# Altium PCB task1_pcb.PcbDoc
Units mm, origin at the board's own origin, x right, y up, seen from the top; angles counter-clockwise.
Board outline 36 x 24.9 mm, 2 copper layers (Top Layer, Bottom Layer); 9 components, 5 nets, 30 pads, 0 vias.
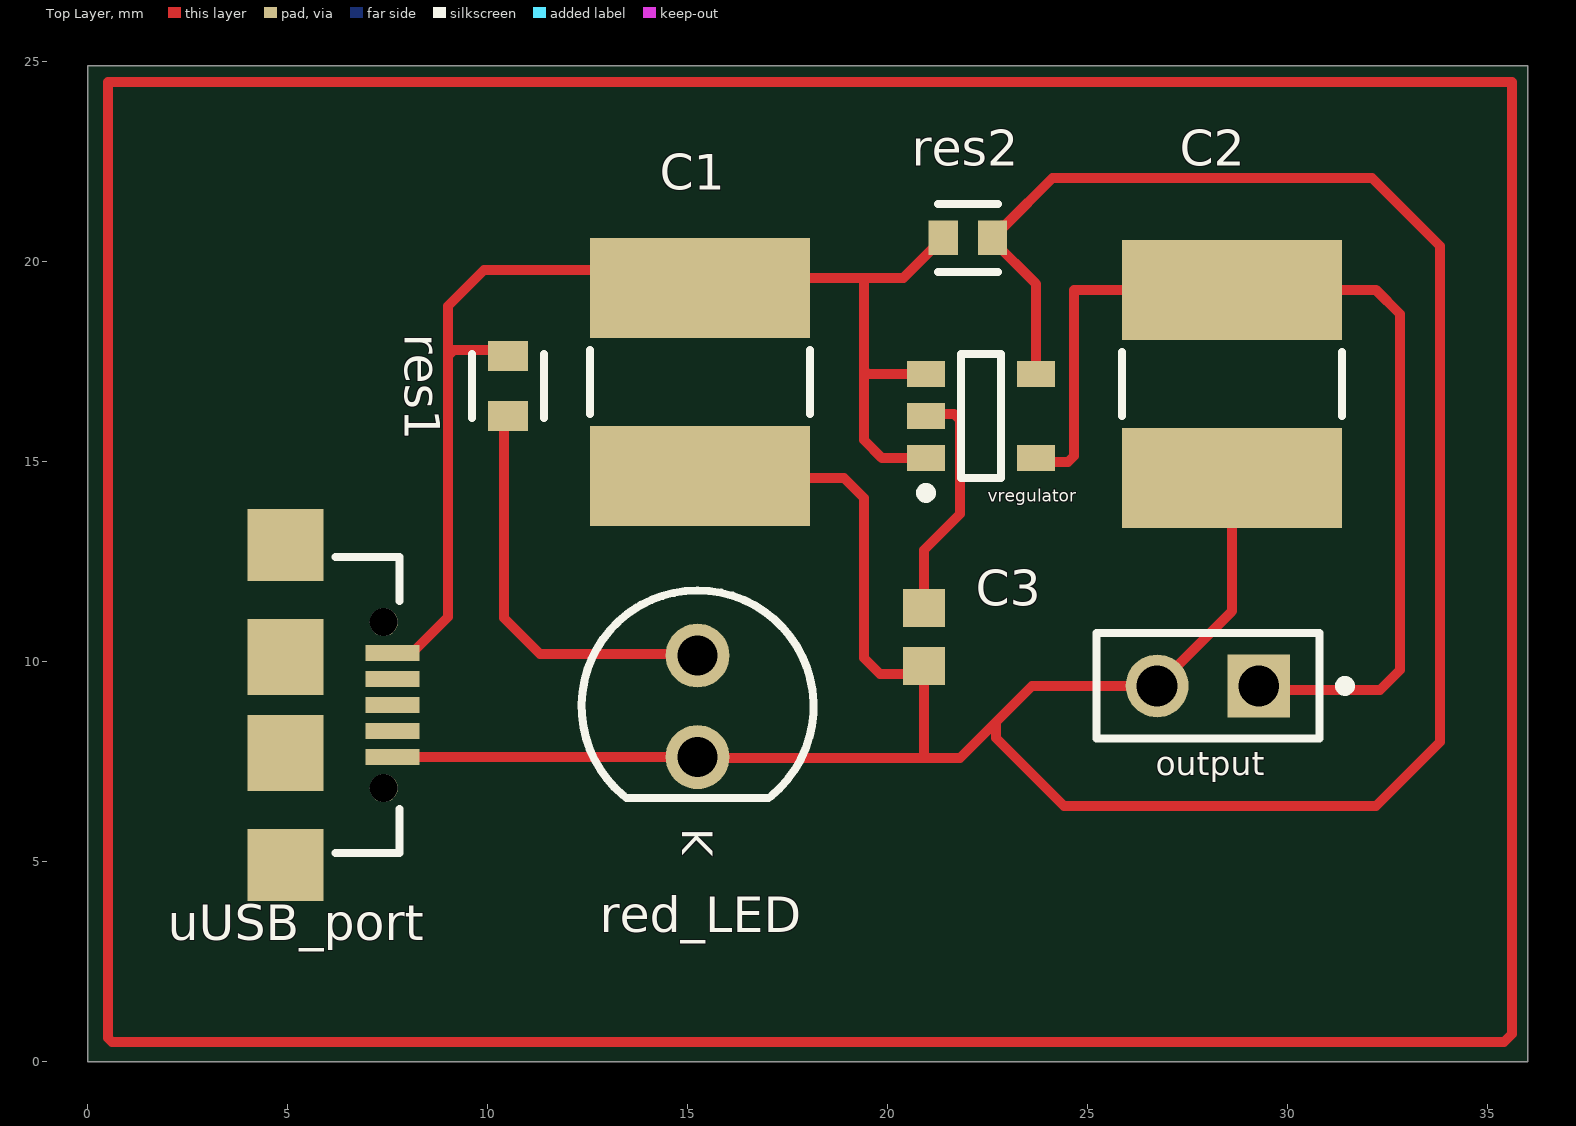
[diagram p0: Top Layer view]
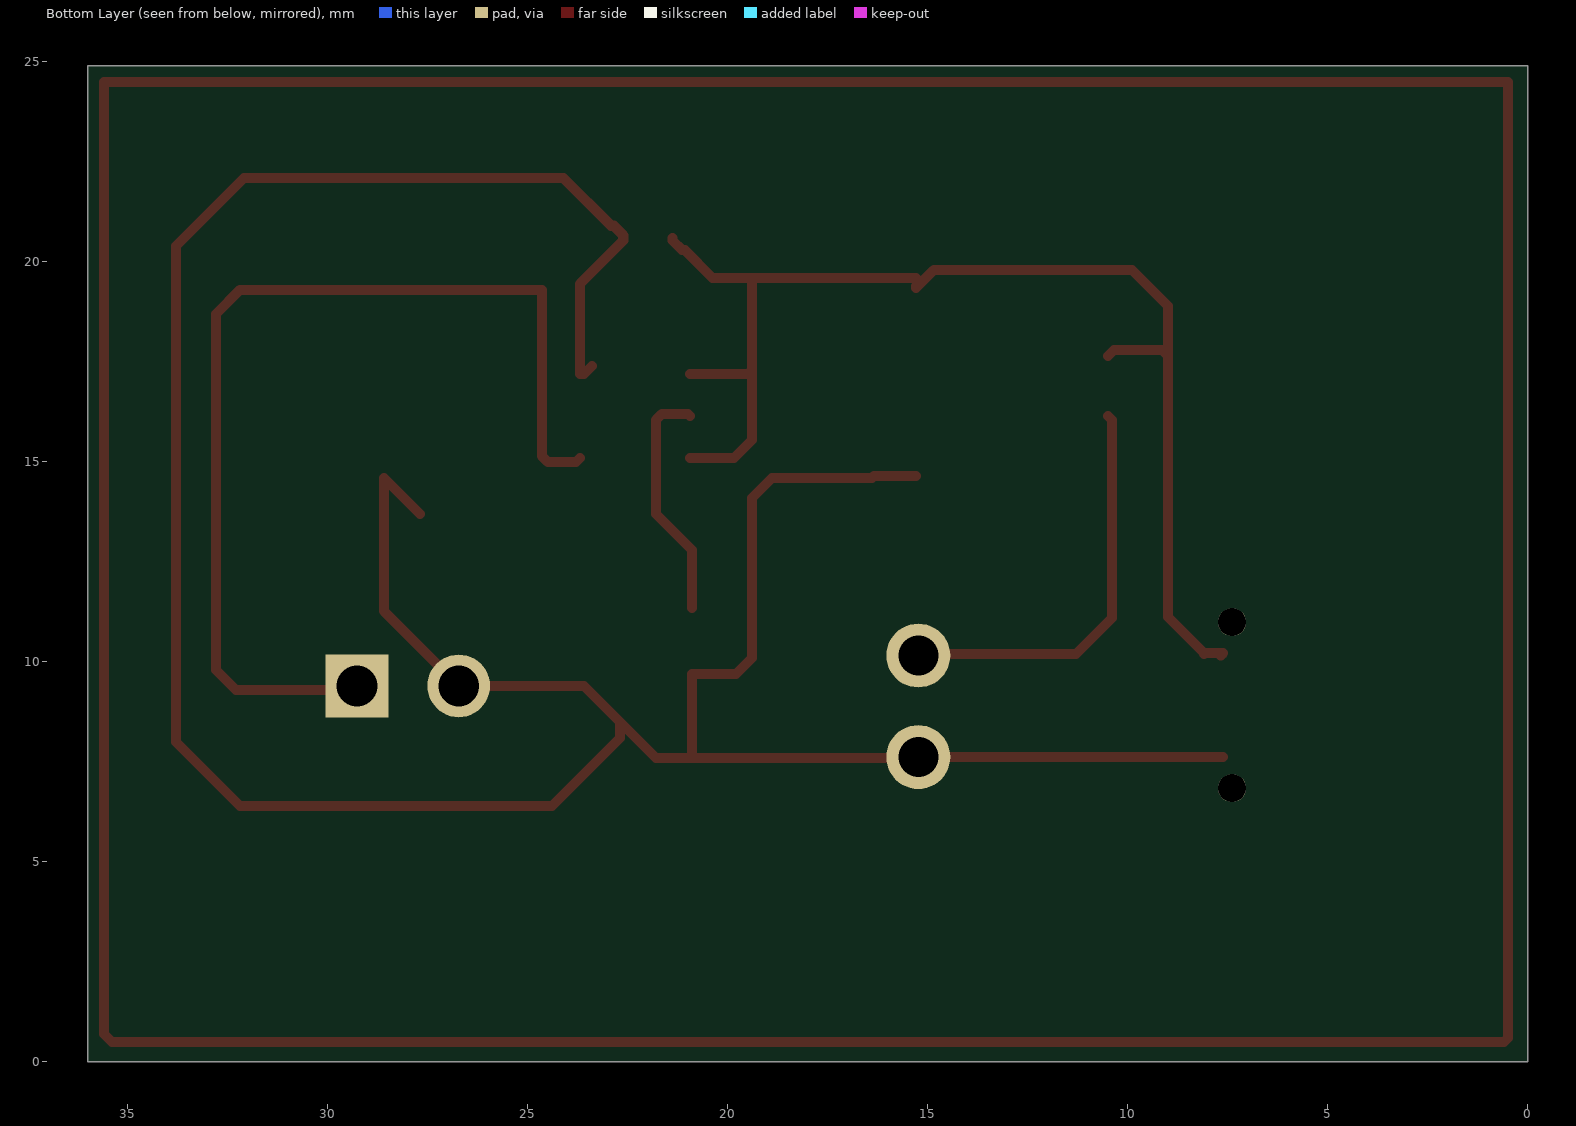
[diagram p1: Bottom Layer view, seen from below]
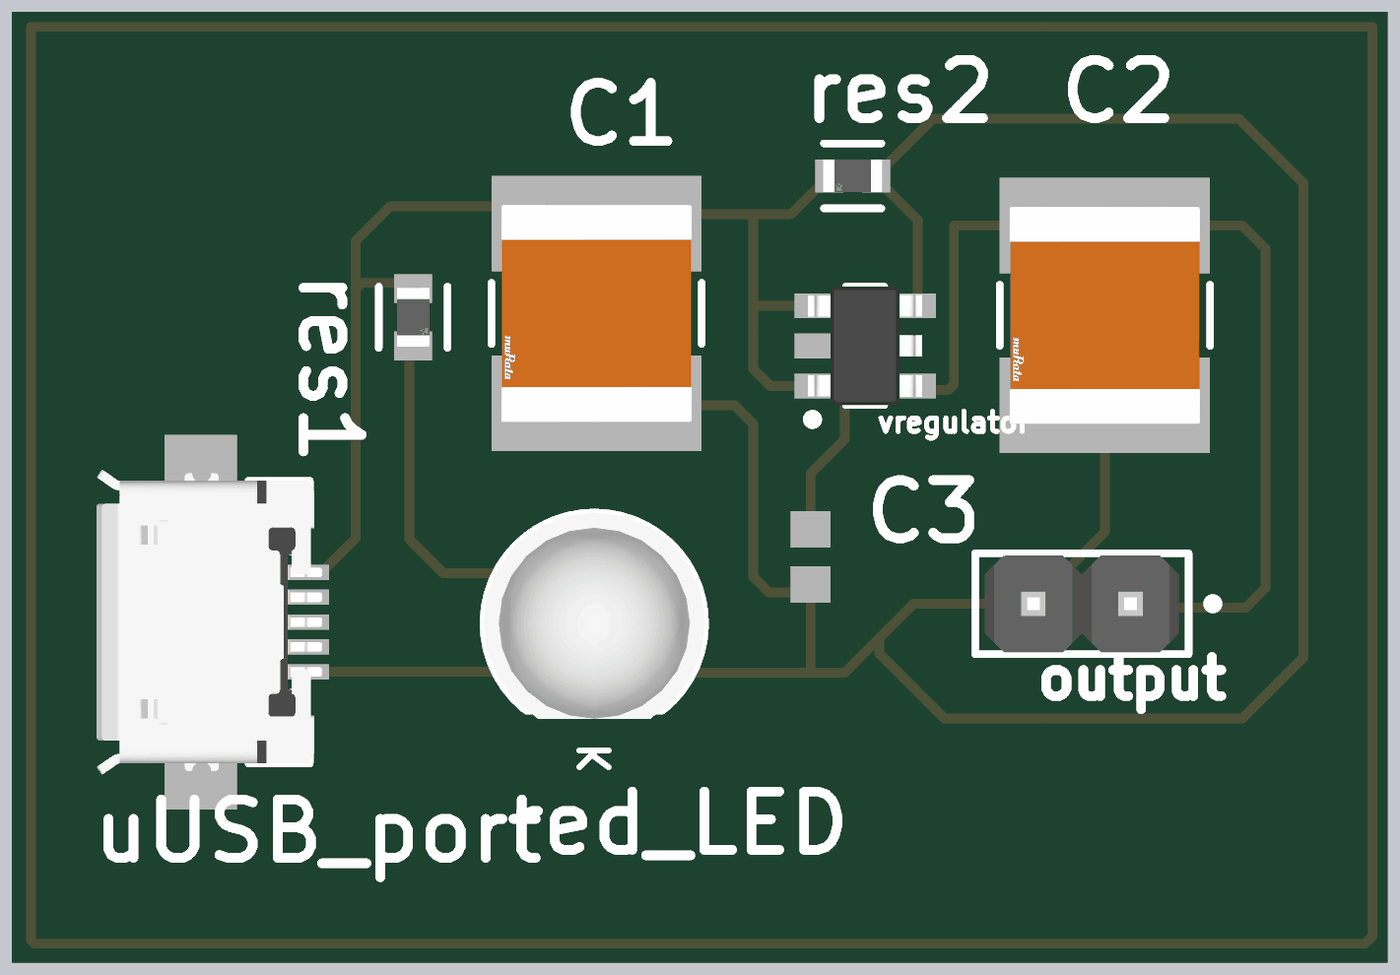
[diagram p2: 3D render of the assembled board from above, using the file's embedded part models]

## Layer stack, top to bottom
Top Solder: solder mask 0.0102, Solder Resist, Dk 3.5
Top Layer: signal copper 0.0356
Dielectric 1: dielectric 0.32, FR-4, Dk 4.8
Bottom Layer: signal copper 0.0356
Bottom Solder: solder mask 0.0102, Solder Resist, Dk 3.5

## Board outline
0,0 36,0 36,24.9 0,24.9

## Design rules (kind name [scope] priority, off if disabled: settings)
AssemblyTestPointUsage [All] p1: valid=2
Clearance [All] p1: gap=0.05 ignorepadtopadclearanceinfootprint=FALSE
FabricationTestPointUsage [All] p1: valid=2 allowmultiple=FALSE
MinimumSolderMaskSliver [All] p1: minsoldermaskwidth=0
PolygonConnect [All] p1: connectstyle=Relief reliefconductorwidth=0.254 reliefentries=4 polygonreliefangle="90 Angle" airgapwidth=0.254
RoutingVias [All] p1: holewidth=0.6 width=1 viastyle="Through Hole" minholewidth=0.6 minwidth=1 maxholewidth=0.6 maxwidth=1
SilkToSolderMaskClearance [IsPad] p1: minsilkscreentomaskgap=0.05 clearancetoexposedcopper=TRUE
SolderMaskExpansion [All] p1: expansion=0
Width [All] p1: maxlimit=0.254 minlimit=0.254 preferedwidth=0.254
26 further rules are at their usual default settings.

## Components (designator, comment, footprint, x,y, rotation, side; value= is the part's Value field where it differs from the comment)
C1 "GRM55DR72E105KW01L" FP-GRM55D-0_4-IPC_A 15.3,17 r270 top
C2 "GRM55DR72E105KW01L" FP-GRM55D-0_4-IPC_A 28.6,16.95 r270 top
C3 "GRM188R71H223KA01D" CAPC1608X90X35ML10T15 20.9,10.625 r90 top
output "M20-9990246" FP-M20-9990246-MFG 28,9.4 r180 top
red_LED "151051RS11000" "Type 5mm" 15.24,8.89 r270 top
res1 "CRCW0603220RFKEA" FP-CRCW0603-e3-MFG 10.5,16.9 r90 top
res2 "CRCW0603100KJNEA" FP-CRCW0603-e3-IPC_C 22,20.6 r180 top
uUSB_port "629105136821" 629105136821 4.945,8.92 r270 top
vregulator "Component_1" 9193new 22.325,16.15 r0 top

## Footprints (in the part's own frame and the unit in brackets; to place one, negate y for a bottom-side part, rotate by r counter-clockwise, add the part's x,y. Pads: shape width x height; smd on the part's side, far side on the other; paste and mask are expansions set on the pad)
9193new [mm] "SOT23, 5-Leads, Body 2.90x2.79mm, Pitch 1.05mm, IPC Medium Density"
  rect 0.95x0.65 smd: BP(-1.375,0) EN(-1.375,1.05) GND(1.375,1.05) VIN(-1.375,-1.05) VOUT(1.375,-1.05)
  silkscreen extent -1.5,-2.05 0.5,1.55, body extent -1.5,-1.55 1.5,1.55, height 1.3
629105136821 [mm] "Micro USB 2.0 SMT Type B Horizontal 5 Contacts"
  rect 0.4x1.35 smd: 1(-1.3,2.675) 2(-0.65,2.675) 3(0,2.675) 4(0.65,2.675) 5(1.3,2.675)
  round 0.7 hole 0.7 unplated: MH1(-2.075,2.45) MH2(2.075,2.45)
  rect 1.8x1.9 smd: Shell(-4,0) Shell(4,0)
  rect 1.9x1.9 smd: Shell(-1.2,0) Shell(1.2,0)
  silkscreen extent -3.7,1.25 3.7,2.85, body extent -4,-2.73 4,3.17, height 2.69
CAPC1608X90X35ML10T15 [mm] "Chip Capacitor, 2-Leads, Body 1.60x0.80mm, IPC Low Density"
  rect 0.95x1.05 smd: 1(-0.725,0) 2(0.725,0)
  body extent -0.85,-0.45 0.85,0.45, height 0.9
FP-CRCW0603-e3-IPC_C [mm]
  rect 0.735x0.862 smd paste+0 mask+0: 1(-0.615,0) 2(0.615,0)
  silkscreen extent -0.75,-0.85 0.75,0.85, body extent -0.77,-0.42 0.78,0.43, height 0.5
FP-CRCW0603-e3-MFG [mm]
  rect 0.75x1 smd paste+0 mask+0: 1(-0.75,0) 2(0.75,0)
  silkscreen extent -0.8,-0.9 0.8,0.9, body extent -0.78,-0.42 0.77,0.42, height 0.5
FP-GRM55D-0_4-IPC_A [mm]
  rect 2.502x5.503 smd paste+0 mask+0: 1(-2.35,0) 2(2.35,0)
  silkscreen extent -0.8,-2.75 0.8,2.75, body extent -4.1,-3.25 4.1,3.25, height 0.25
FP-M20-9990246-MFG [mm]
  rect 1.57x1.57 hole 1.02 paste-1000 mask+0: 1(-1.27,0)
  round 1.57 hole 1.02 paste-1000 mask+0: 2(1.27,0)
  silkscreen extent -3.55,-1.32 2.79,1.32, body extent -2.54,-1.27 2.54,1.27, height 8.99
"Type 5mm" [mm] "THT, LED-5mm, 2pin- Body 5.8mm"
  round 1.6 hole 1: 1(1.27,0) 2(-1.27,0)
  silkscreen extent -2.9,-2.9 2.29,2.9, body extent -2.9,-2.9 2.5,2.9, height 11.7

## Part data
C1 C2: library part CMP-2000-06370-2, "Chip Multilayer Ceramic Capacitors for General Purpose, 2220, 1.0uF, X7R, 15%, 10%, 250V", Capacitance=1uF, Case/Package=2220, Case Code (Metric)=5750, Dielectric=X7R, Max Operating Temperature=125°C, Min Operating Temperature=-55°C, Package Quantity=1, Supplier Part Number 1=7236928, Tolerance=10%, Voltage=250V, Case Code (Imperial)=2220, Depth=5mm, Height=2mm, Lead Free="Lead Free", Length=5.7mm, Material=Ceramic, Mount="Surface Mount", Number of Pins=2, Packaging="Tape and Reel", REACH SVHC="No SVHC", Supplier 1=RSComponents, Termination=SMD/SMT, Thickness=0.087inch, Voltage Rating=250V, Voltage Rating (DC)=250V, Width=5mm
C3: library part CMP-2006-02910-1, Manufacturer=Murata, Part Number=GRM188R71H223KA01D, Supplier 1="Arrow Electronics", Supplier Part Number 1=GRM188R71H223KA01D
output: library part CMP-15831-000009-1, "CONN HEADER VERT 2POS 2.54MM", Current Rating=3A, Manufacturer=Harwin, Temperature="-40°C to +105°C", Temperature Range High=+105°C, Temperature Range Low=-40°C, Automotive=No, Category=Conn, ComponentLink2Description=Datasheet, ComponentLink2URL=https://cdn.harwin.com/pdfs/M20-999.pdf, Conn Gender=Male, Conn Orientation=Vertical, Contact Material=Tin,Nickel, Device Class L1=Connectors, Device Class L2="Headers and Wire Housings", Device Class L3=unset, Digikey Description="CONN HEADER VERT 2POS 2.54MM", Height=8.99mm, Lead Free=Yes, Manufacturer Part Number=M20-9990246, Mouser Description="2.54mm (0.1\") Pitch SIL Vertical PC Tail Pin Header, 6.1mm mating pin height, tin, 2 contacts", Number Of Contacts=2, Number Of Rows=1, Octopart=https://octopart.com/m20-9990246-harwin-2590635, Package=M20-9990246, Pitch=2.54mm, RoHS=TRUE
red_LED: library part CMP-1488-00008-1, "THT LED round mono-color color lens, WL-TMRW, Red", Emitting color=Red, Manufacturer="Wuerth Elektronik", ComponentLink1Description="Manufacturer URL", ComponentLink1URL=http://www.we-online.com, ComponentLink2Description=Datasheet, ComponentLink2URL=http://katalog.we-online.de/pbs/datasheet/7448042001.pdfhttp://katalog.we-online.de/pbs/datasheet/7448042001.pdfhttp://katalog.we-online.de/pbs/datasheet/7448042001.pdfhttp://katalog.we-online.de/pbs/datasheet/151051RS11000.pdf, PackageReference="Type 5mm", PartNumber=151051RS11000
res1: library part CMP-2000-03085-2, "RES Thick Film, 220O, 1%, 0.1W, 100ppm/°C, 0603", Case/Package=0603, Case Code (Metric)=1608, Max Operating Temperature=155°C, Max Power Dissipation=100mW, Min Operating Temperature=-55°C, Package Quantity=10, Resistance=220R, Supplier Part Number 1=1694293, Temperature Coefficient=100ppm/°C, Tolerance=1%, Voltage Rating=75V, Case Code (Imperial)=0603, Composition="Thick Film", Contact Plating=Tin, Depth=0.85mm, Features="Automotive AEC-Q200", Height=0.45mm, Lead Free="Lead Free", Length=1.55mm, Military Standard=Not, Number of Terminations=2, Packaging="Tape and Reel", Power Rating=100mW, Radiation Hardening=No, Supplier 1=RSComponents, Termination=SMD/SMT, Voltage Rating (DC)=75V, Weight=7.1E-05oz, Width=0.033inch
res2: library part CMP-2000-03823-2, "RES Thick Film, 100kO, 5%, 0.1W, 200ppm/°C, 0603", Case/Package=0603, Case Code (Metric)=1608, Max Operating Temperature=155°C, Max Power Dissipation=100mW, Min Operating Temperature=-55°C, Package Quantity=1, Resistance=100kR, Supplier Part Number 1=1692517, Temperature Coefficient=200ppm/°C, Tolerance=5%, Voltage Rating=75V, Case Code (Imperial)=0603, Composition="Thick Film", Contact Plating=Tin, Depth=0.85mm, Features="Automotive AEC-Q200", Height=0.02inch, Length=1.55mm, Military Standard=Not, Mount="Surface Mount", Number of Pins=2, Number of Terminations=2, Packaging="Tape and Reel", Power Rating=100mW, Radiation Hardening=No, Supplier 1=Farnell, Termination=SMD/SMT, Weight=7.1E-05oz, Width=0.85mm, Working Voltage=75V
uUSB_port: library part CMP-1502-03253-1, "Micro USB 2.0 Type B Receptacle WR-COM, Horizontal, SMT, with Pads and Pegs", Contact Resistance=30mOhm, Manufacturer="Wurth Elektronik", Operating Temperature=-40to105degC, Rated Current=1A, Working Voltage=30VAC, Connector Type=MicroUSB2.0TypeB, Datasheet URL=https://katalog.we-online.de/em/datasheet/629105136821.pdf, Gender=Receptacle, Manufacturer URL=http://www.we-online.de, Mounting Technology=SMT, Orientation=Horizontal, Package Reference=629105136821, Packaging=TapeandReel, Part Number=629105136821, Publisher=WurthElektronik

## Nets (pads, with @x,y where several pads share a name; then routed paths per layer and width w, separated by ;. In a path a pad name is that pad's centre, name@x,y a point inside that pad or via, vN(x,y) a via of type N, cw(c..) or ccw(c..) an arc to the next point about the centre after c; other vN are vias at no path point)
3V3: C2.1 output.1 vregulator.VOUT | length 26.3
  Top Layer w0.254: vregulator.VOUT 23.8,15 24.502,15 24.651,15.149 24.651,19.301 C2.1 32.199,19.301 32.8,18.7 32.8,9.8 32.3,9.3 29.37,9.3 output.1
GND: C1.2 C2.2 C3.1 output.2 red_LED.1 res2.1 uUSB_port.5 vregulator.GND | length 81.3
  Top Layer w0.254: uUSB_port.5 red_LED.1 15.26,7.6 20.9,7.6 ; C1.2 16.35,14.65 16.4,14.6 18.9,14.6 19.4,14.1 19.4,10.1 19.8,9.7 20.9,9.7 20.9,7.6 ; vregulator.GND@23.4,17.398 23.598,17.2 vregulator.GND 23.7,19.452 22.615,20.536 res2.1 22.615,20.664 22.856,20.904 22.919,20.904 24.115,22.1 32.1,22.1 33.8,20.4 33.8,8 32.2,6.4 24.4,6.4 22.7,8.1 22.7,8.5 ; C2.2@27.7,13.7 C2.2 28.6,11.27 output.2 23.6,9.4 22.7,8.5 ; 20.9,7.6 21.8,7.6 22.7,8.5
NetC3_2: C3.2 vregulator.BP | length 6
  Top Layer w0.254: C3.2 20.9,12.8 21.8,13.7 21.8,16.051 21.651,16.2 21,16.2 vregulator.BP
Netred_LED_2: red_LED.2 res1.1 | length 10.3
  Top Layer w0.254: res1.1 10.4,16.05 10.4,11.1 11.3,10.2 15.2,10.2 red_LED.2
VCC: C1.1 res1.2 res2.2 uUSB_port.1 vregulator.EN vregulator.VIN | length 32.4
  Top Layer w0.254: uUSB_port.1@7.68,10.16 uUSB_port.1 8.08,10.22 8.1,10.2 8.1,10.225 9,11.125 9,17.651 ; res1.2 10.35,17.8 9.149,17.8 9,17.651 ; vregulator.VIN 19.849,15.1 19.4,15.549 19.4,17.3 ; vregulator.EN 19.5,17.2 19.4,17.3 ; res2.2 21.385,20.536 21.144,20.296 21.081,20.296 20.385,19.6 19.4,19.6 ; 9,17.651 9,18.9 9.9,19.8 14.85,19.8 C1.1 15.3,19.4 15.2,19.5 15.3,19.6 19.4,19.6 ; 19.4,17.3 19.4,19.6
pads on no net: uUSB_port.2 uUSB_port.3 uUSB_port.4 uUSB_port.MH1 uUSB_port.MH2 uUSB_port.Shell
copper on no net: | length 118
  Top Layer w0.254: 0.5,0.6 0.5,24.5 35.6,24.5 35.6,0.7 35.4,0.5 0.6,0.5 0.5,0.6

## Text inside footprints (layer, text, board x,y; h text height)
red_LED: Top Overlay "K" at 15.621,5.842 h0.76 r90; Top Courtyard "K" at 15.621,5.842 h0.76 r90
uUSB_port: Mechanical 2 "PCB Edge" at 2.845,10.12 h0.41 r270